# EAGLE board CT_schematic (EAGLE 7.6.0)

Size 100 x 80 mm. Coordinates in mm from the lower left corner, seen from the top.
Outline: 0,0 100,0 100,80 0,80 0,0
Copper layers (1*16): Top 0.035mm / dielectric 1.5mm / Bottom 0.035mm
Design rules "default": minimum track width 10mil, minimum drill 24mil, track to track 8mil, track to pad 8mil, pad to pad 8mil, via to via 8mil, smd to smd 8mil, copper to edge 40mil, drill to drill 8mil, minimum pad ring 10mil, minimum via ring 8mil, stop-mask expansion 4mil, vias tented up to drill 0mil, thermal gap 10mil

## Footprints (pad centres in the part's own frame; a part is rotated, then mirrored left to right if it is on the bottom)
C0603 = smd 0.8 x 0.8: 1 -0.762,0; 2 0.762,0
C0402 = smd 0.5 x 0.5: 1 -0.508,0; 2 0.508,0
C1210 = smd 1.2 x 2.5: 1 -1.524,0; 2 1.524,0
C0805 = smd 1.2 x 1.3: 1 -1.016,0; 2 1.016,0
EXV-9H = smd 3.505 x 1.676: 1 -2.857,0; 2 2.857,0
L0603 = smd 0.8 x 0.8: 1 -0.762,0; 2 0.762,0
PJ-037B_PACKAGE = drill 3.7 square: 1 12,0 | drill 3.2 square: 2 6,0
R0603 = smd 0.8 x 0.8: 1 -0.762,0; 2 0.762,0
WLCSP36 = smd 0.229 x 0.229: A1 -1,1; A2 -0.6,1; A3 -0.2,1; A4 0.2,1; A5 0.6,1; A6 1,1; B1 -1,0.6; B2 -0.6,0.6; B3 -0.2,0.6; B4 0.2,0.6; B5 0.6,0.6; B6 1,0.6; C1 -1,0.2; C2 -0.6,0.2; C3 -0.2,0.2; C4 0.2,0.2; C5 0.6,0.2; C6 1,0.2; D1 -1,-0.2; D2 -0.6,-0.2; D3 -0.2,-0.2; D4 0.2,-0.2; D5 0.6,-0.2; D6 1,-0.2; E1 -1,-0.6; E2 -0.6,-0.6; E3 -0.2,-0.6; E4 0.2,-0.6; E5 0.6,-0.6; E6 1,-0.6; F1 -1,-1; F2 -0.6,-1; F3 -0.2,-1; F4 0.2,-1; F5 0.6,-1; F6 1,-1
SOIC-8 = smd 1.6 x 0.6: 1 -2.7,1.905 | smd 1.55 x 0.6: 2 -2.7,0.635; 3 -2.7,-0.635; 4 -2.7,-1.905; 5 2.7,-1.905; 6 2.7,-0.635; 7 2.7,0.635; 8 2.7,1.905
SON-8 = smd 0.35 x 0.85: 1 -0.975,-1.475; 2 -0.325,-1.475; 3 0.325,-1.475; 4 0.975,-1.475; 5 0.975,1.475; 6 0.325,1.475; 7 -0.325,1.475; 8 -0.975,1.475 | smd 2.4 x 1.65: PAD 0,0
ABS07-32.768KHZ-7-T = smd 1.1 x 2.4: 1 -2.5,0; 2 0,0
ABLS-25.000MHZ-B2F-T = smd 5.6 x 2.8: 1 -3.81,0; 2 5.69,0
WSON-8 = smd 0.3 x 0.6: 1 -0.75,0; 2 0.05,0; 3 0.85,0; 4 1.65,0; 5 1.65,3.8; 6 0.85,3.8; 7 0.05,3.8; 8 -0.75,3.8 | smd 3 x 2.6: PAD 0.45,1.9
SON-6 = smd 0.55 x 0.3: 1 -0.355,0.5 | smd 0.52 x 0.3: 2 -0.37,0; 3 -0.37,-0.5; 4 0.37,-0.5; 5 0.37,0; 6 0.37,0.5
SW_4-1437565-2 = smd 1.4 x 2.1: 1 -2.23,4.55; 2 -2.23,-4.55; 3 2.23,4.55; 4 2.23,-4.55
LGM67K-G1J2-24-Z = smd 0.8 x 1.4: A -2,0; C 0,0
NC7SZ125M5X = smd 1.3 x 0.7: 1 -1.3,0.95; 2 -1.3,0; 3 -1.3,-0.95; 4 1.3,-0.95; 5 1.3,0.95

## Placement (x,y rotation side)
C1  1e-07  [C0603]  -31.75,54.61 0 top  (outside the outline)
C2  1e-07  [C0603]  -35.56,54.61 0 top  (outside the outline)
C3  4.7e-06  [C0603]  -24.13,54.61 0 top  (outside the outline)
C4  4.7e-06  [C0603]  -27.94,54.61 0 top  (outside the outline)
C5  1e-08  [C0603]  -39.37,54.61 0 top  (outside the outline)
C6  1e-08  [C0603]  -43.18,54.61 0 top  (outside the outline)
C7  1e-06  [C0603]  -46.99,54.61 0 top  (outside the outline)
C8  1e-11  [C0402]  -34.29,59.69 0 top  (outside the outline)
C9  1e-11  [C0402]  -38.1,59.69 0 top  (outside the outline)
C10  1e-11  [C0402]  -41.91,59.69 0 top  (outside the outline)
C11  1e-11  [C0402]  -45.72,59.69 0 top  (outside the outline)
C12  1e-08  [C0402]  -49.53,59.69 0 top  (outside the outline)
C13  1e-07  [C0402]  -53.34,59.69 0 top  (outside the outline)
C14  1e-08  [C0402]  -57.15,59.69 0 top  (outside the outline)
C15  1e-05  [C1210]  -33.02,41.91 0 top  (outside the outline)
C16  1e-05  [C0805]  -50.8,41.91 0 top  (outside the outline)
C17  1e-07  [C0402]  -15.24,64.77 0 top  (outside the outline)
C18  0.0001  [EXV-9H]  -52.07,19.05 0 top  (outside the outline)
C19  0.0001  [EXV-9H]  -17.78,27.94 0 top  (outside the outline)
C20  1e-08  [C0402]  -19.05,64.77 0 top  (outside the outline)
F1  240.0  [L0603]  -50.8,54.61 0 top  (outside the outline)
J1  PJ-037B  [PJ-037B_PACKAGE]  -27.94,7.62 0 top  (outside the outline)
R1  10000.0  [R0603]  -25.4,49.53 0 top  (outside the outline)
R2  1000.0  [R0603]  -54.61,54.61 0 top  (outside the outline)
R3  910.0  [R0603]  -58.42,54.61 0 top  (outside the outline)
R4  4700.0  [R0603]  -15.24,59.69 0 top  (outside the outline)
R5  2200.0  [R0603]  -19.05,59.69 0 top  (outside the outline)
R6  2200.0  [R0603]  -22.86,59.69 0 top  (outside the outline)
R7  10000.0  [R0603]  -30.48,49.53 0 top  (outside the outline)
R8  10000.0  [R0603]  -35.56,49.53 0 top  (outside the outline)
R9  10000.0  [R0603]  -40.64,49.53 0 top  (outside the outline)
R10  10000.0  [R0603]  -45.72,49.53 0 top  (outside the outline)
R11  10000.0  [R0603]  -50.8,49.53 0 top  (outside the outline)
R12  100000.0  [R0603]  -55.88,41.91 0 top  (outside the outline)
R13  806.0  [R0603]  -26.67,59.69 0 top  (outside the outline)
R14  1000.0  [R0603]  -30.48,59.69 0 top  (outside the outline)
R15  10000.0  [R0603]  -55.88,49.53 0 top  (outside the outline)
R16  10000.0  [R0603]  -15.24,54.61 0 top  (outside the outline)
R17  82000.0  [R0603]  -20.32,54.61 0 top  (outside the outline)
R18  300000.0  [R0603]  -15.24,49.53 0 top  (outside the outline)
R19  120000.0  [R0603]  -20.32,49.53 0 top  (outside the outline)
U1  stm32f048t6y7  [WLCSP36]  -38.1,41.91 0 top  (outside the outline)
U2  AT25512N-SH-T  [SOIC-8]  -22.86,19.05 0 top  (outside the outline)
U3  PCF85063TP/1Z  [SON-8]  -27.94,41.91 0 top  (outside the outline)
U4  ABS07-32.768KHZ-7-T  [ABS07-32.768KHZ-7-T]  -27.94,35.56 0 top  (outside the outline)
U5  ABS07-32.768KHZ-7-T  [ABS07-32.768KHZ-7-T]  -46.99,35.56 0 top  (outside the outline)
U6  ABLS-25.000MHZ-B2F-T  [ABLS-25.000MHZ-B2F-T]  -36.83,27.94 0 top  (outside the outline)
U7  LP3878SDX-ADJ/NOPB  [WSON-8]  -44.45,17.78 0 top  (outside the outline)
U8  TPS3895ADRYR  [SON-6]  -21.59,63.5 0 top  (outside the outline)
U9  4-1437565-2  [SW_4-1437565-2]  -44.45,6.35 0 top  (outside the outline)
U10  Q65110A2395  [LGM67K-G1J2-24-Z]  -17.78,43.18 0 top  (outside the outline)
U11  nc7sz125m5x  [NC7SZ125M5X]  -44.45,41.91 0 top  (outside the outline)

## Library data of the parts
C1-C20 F1 J1 R1-R19 U1-U11 = circuit_tree

## Nets
CLK_CRYSTAL_U1_B5: C10.1 U1.B5 U6.1
CLK_CRYSTAL_U1_B6: C8.1 U1.B6 U5.1
CLK_CRYSTAL_U1_C5: C11.1 U1.C5 U6.2
CLK_CRYSTAL_U1_C6: C9.1 U1.C6 U5.2
CLK_CRYSTAL_U3_1: U3.1 U4.1
CLK_CRYSTAL_U3_2: U3.2 U4.2
GND: C1.2 C2.2 C3.2 C4.2 C5.2 C6.2 C7.2 C8.2 C9.2 C10.2 C11.2 C12.2 C13.2 C14.2 C15.2 C16.2 C17.2 C18.2 C19.2 C20.2 J1.2 R2.2 R7.2 R14.2 R17.2 R19.2 U1.D6 U1.F1 U2.4 U3.4 U3.PAD U7.3 U7.PAD U8.2 U10.C U11.1 U11.3
NET_U1_A1: R6.1 U1.A1 U3.5
NET_U1_B4: R5.1 U1.B4 U3.6
NET_U1_D5: R4.1 U1.D5 U11.4
NET_U1_E5: C5.1 C6.1 C7.1 F1.1 U1.E5
NET_U1_F2: R7.1 U1.F2
NET_U1_F5: R3.1 U1.F5 U10.A
NET_U1_F6: R1.1 U1.F6 U9.3 U9.4
NET_U2_3: R8.1 U2.3
NET_U2_7: R10.1 U2.7
NET_U3_3: R11.1 U3.3
NET_U7_1: C14.1 U7.1
NET_U7_6: R13.2 R14.1 U7.6
NET_U7_8: R12.1 U7.8
NET_U8_1: R16.1 R17.1 U8.1
NET_U8_3: R18.2 R19.1 U8.3
NET_U8_4: R15.1 U8.4 U11.2
NET_U9_1: R2.1 U9.1 U9.2
PROC_SPI1_MISO: U1.A3 U2.2
PROC_SPI1_MOSI: U1.E6 U2.5
PROC_SPI1_NSS: R9.1 U1.A2 U2.1
PROC_SPI1_SCK: U1.B3 U2.6
VCC_S1_12V2: C15.1 C18.1 C19.1 J1.1 R12.2 U7.4
VCC_TIER1_1V8: C1.1 C2.1 C3.1 C4.1 C12.1 C13.1 C16.1 C17.1 C20.1 F1.2 R1.2 R3.2 R4.2 R5.2 R6.2 R8.2 R9.2 R10.2 R11.2 R13.1 R15.2 R16.2 R18.1 U1.A5 U1.E1 U2.8 U3.8 U7.5 U8.6 U11.5

## Tracks (layer width: path | path; a pad name or v marks a point on that pad's centre or on a via)
CLK_CRYSTAL_U1_B5  (2 unrouted)
CLK_CRYSTAL_U1_B6  (2 unrouted)
CLK_CRYSTAL_U1_C5  (2 unrouted)
CLK_CRYSTAL_U1_C6  (2 unrouted)
CLK_CRYSTAL_U3_1  (1 unrouted)
CLK_CRYSTAL_U3_2  (1 unrouted)
GND  (36 unrouted)
NET_U1_A1  (2 unrouted)
NET_U1_B4  (2 unrouted)
NET_U1_D5  (2 unrouted)
NET_U1_E5  (4 unrouted)
NET_U1_F2  (1 unrouted)
NET_U1_F5  (2 unrouted)
NET_U1_F6  (3 unrouted)
NET_U2_3  (1 unrouted)
NET_U2_7  (1 unrouted)
NET_U3_3  (1 unrouted)
NET_U7_1  (1 unrouted)
NET_U7_6  (2 unrouted)
NET_U7_8  (1 unrouted)
NET_U8_1  (2 unrouted)
NET_U8_3  (2 unrouted)
NET_U8_4  (2 unrouted)
NET_U9_1  (2 unrouted)
PROC_SPI1_MISO  (1 unrouted)
PROC_SPI1_MOSI  (1 unrouted)
PROC_SPI1_NSS  (2 unrouted)
PROC_SPI1_SCK  (1 unrouted)
VCC_S1_12V2  (5 unrouted)
VCC_TIER1_1V8  (29 unrouted)